# Altium PCB PCB1.PcbDoc
Units mil, origin at the board's own origin, x right, y up, seen from the top; angles counter-clockwise.
Board outline 1375.36 x 2570.03 mil, 2 copper layers (Top Layer, Bottom Layer); 50 components, 34 nets, 131 pads, 21 vias.
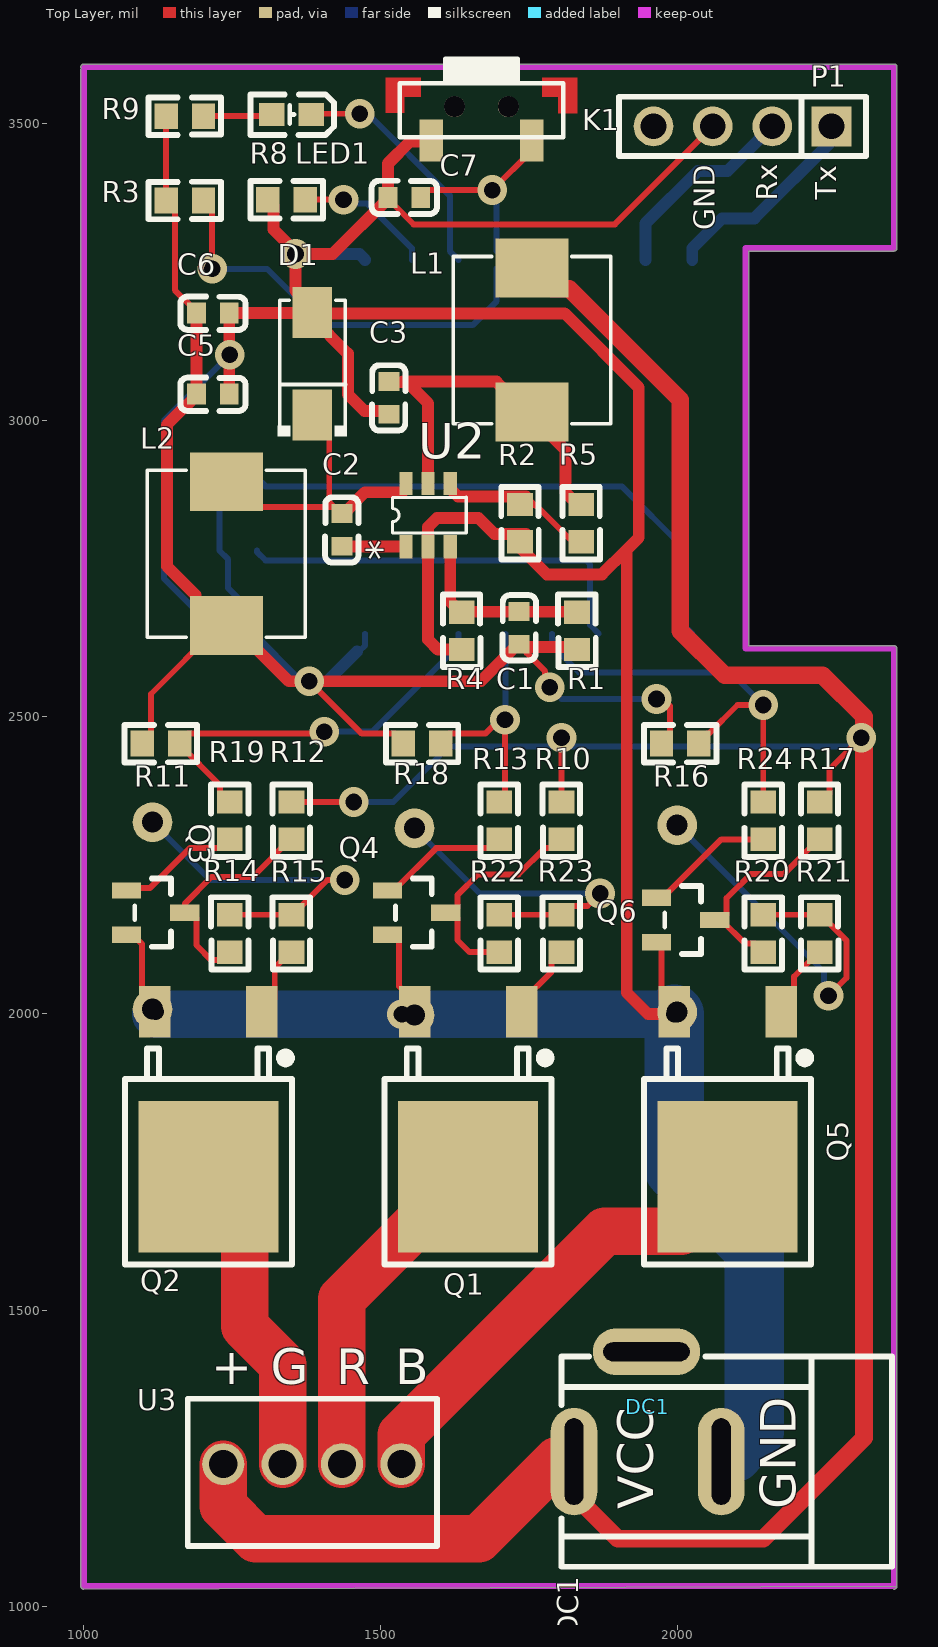
[diagram p0: Top Layer view]
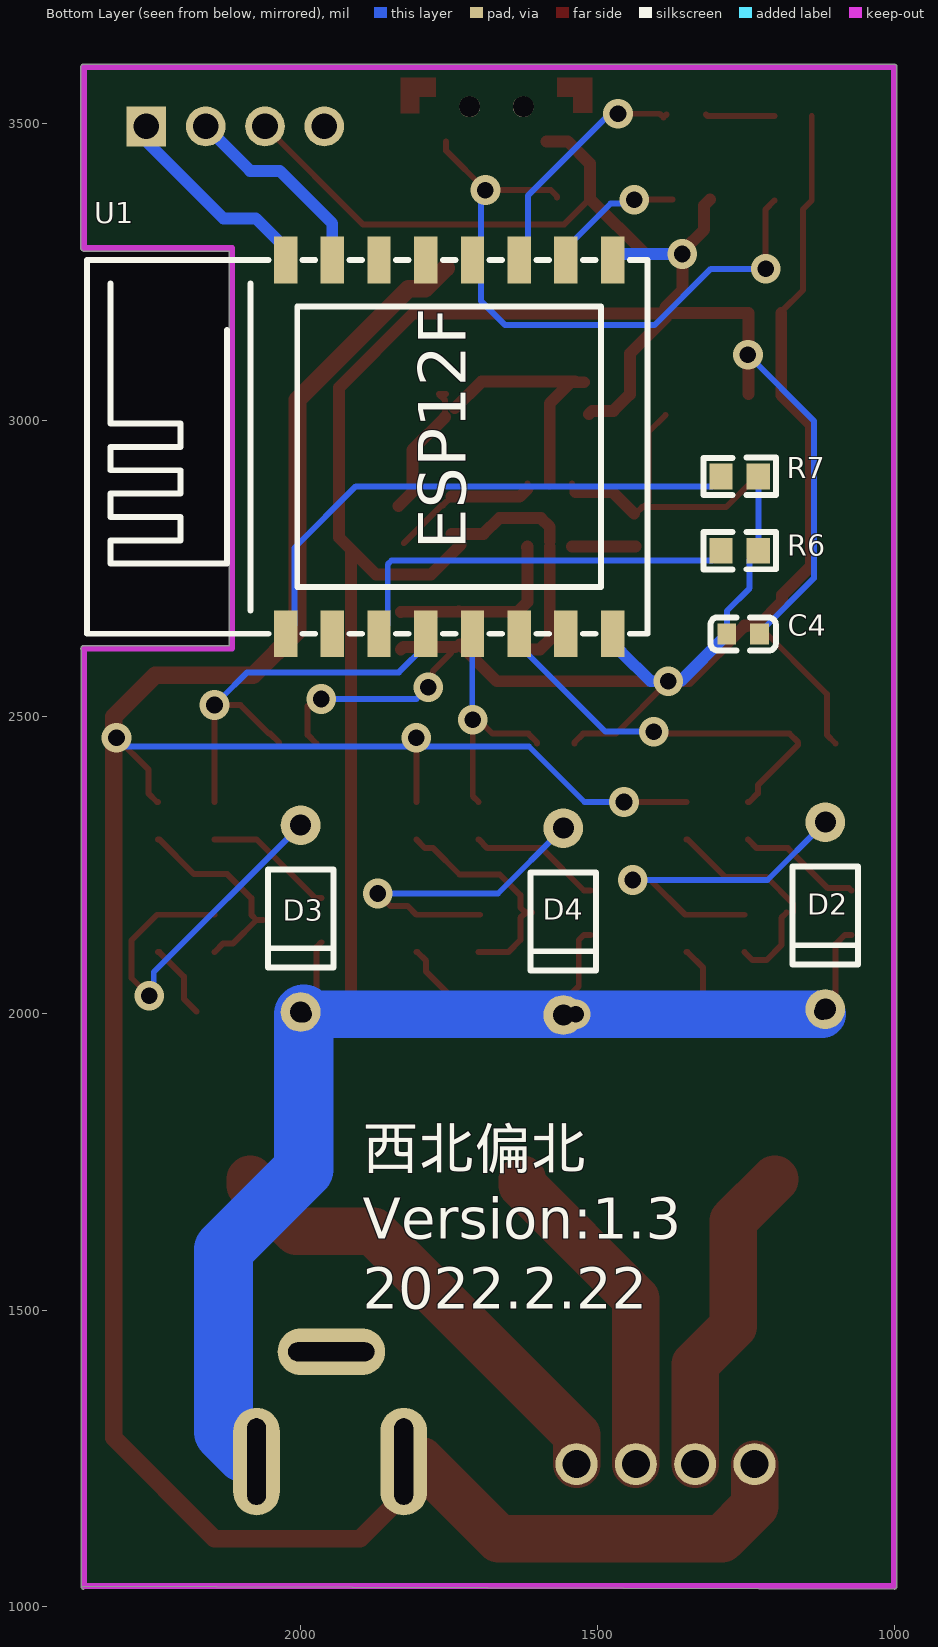
[diagram p1: Bottom Layer view, seen from below]

## Layer stack, top to bottom
Top Solder: solder mask 0.4, Solder Resist, Dk 3.5
Top Layer: signal copper 1.4
Dielectric 1: dielectric 12.6, FR-4, Dk 4.8
Bottom Layer: signal copper 1.4
Bottom Solder: solder mask 0.4, Solder Resist, Dk 3.5

## Board outline
1000,1029.98 cw(c1000,1035) 994.99,1035 994.98,3590 cw(c1000,3590) 995.65,3592.5 cw(c1000,3595) 1000,3600.01 2365.33,3600.01 cw(c2365.33,3595) 2370.35,3595 2370.35,3290 cw(c2365.33,3290) 2365.33,3284.99 2120.18,3284.99 2120.18,2620.01 2365.16,2620.01 cw(c2365.16,2615) 2370.18,2615 cw(c2365.16,2615) 2370.01,2613.72 2370.01,1035 cw(c2365,1035) 2368.55,1031.45 cw(c2365,1035) 2365,1029.98 ccw(c2365,1035) 2368.55,1031.45 2370.01,1035 cw(c2365,1035)

## Design rules (kind name [scope] priority, off if disabled: settings)
Clearance [All] p1: gap=10 ignorepadtopadclearanceinfootprint=FALSE except(0: Arc-Hole Track-Hole SMDPad-Hole THPad-Hole Via-Hole Fill-Hole Poly-Hole Region-Hole Text-Hole)
PolygonConnect [All] p1: connectstyle=Relief reliefconductorwidth=10 reliefentries=4 polygonreliefangle="90 Angle" airgapwidth=10
RoutingVias [All] p1: holewidth=28 width=50 viastyle="Through Hole" minholewidth=28 minwidth=50 maxholewidth=28 maxwidth=50
SolderMaskExpansion [All] p1: expansion=4
Width [All] p1: maxlimit=100 minlimit=10 preferedwidth=10
30 further rules are at their usual default settings.

## Components (designator, comment, footprint, x,y, rotation, side; value= is the part's Value field where it differs from the comment)
C1 "20pf" C0603 1733.47,2650 r270 top
C2 "0.1u" C0603 1435.16,2815 r90 top
C3 "10u" C0603 1514.22,3037.44 r90 top
C4 "0.1u" C0603 1254.18,2640 r0 bottom
C5 "47uf/16v" C0603 1217.61,3043.82 r180 top
C6 "0.1uf" C0603 1217.61,3180.43 r180 top
C7 "1u" C0603 1540.16,3375 r0 top
D1 "SS14_C2900678" SMA_L4.3-W2.5-LS5.0-RD-1 1385.16,3095 r90 top
D2 "1N4746A_C843681" DO-41_BD2.8-L4.2-P8.00-D0.7-FD 1115.8,2165 r270 bottom
D3 "1N4746A_C843681" DO-41_BD2.8-L4.2-P8.00-D0.7-FD 2000,2160 r270 bottom
D4 "1N4746A_C843681" DO-41_BD2.8-L4.2-P8.00-D0.7-FD 1557.34,2155 r270 bottom
DC1 "DC005-2.0MM" DC-IN-TH_DC005-T20 1950.21,1337.53 r180 top
K1 "TS-1188E" "SMD SWITCH 7X3.6X2.7" 1670,3516.35 r180 top
L1 "4.7uH" IND-SMD_L7.3-W6.6_MHCI06030 1755.16,3135 r270 top
L2 "4.7uH" IND-SMD_L7.3-W6.6_MHCI06030 1240.16,2775 r90 top
LED1 "RED" LED0603-R-RD 1350.16,3514.8 r180 top
P1 "" HDR-TH_4P-P2.54-V-M 2110,3495 r180 top
Q1 "IRFR1205TRPBF" TO-252-2_L6.5-W6.1-P4.58-LS10.0-TR 1647.5,1864.1 r0 top
Q2 "IRFR1205TRPBF" TO-252-2_L6.5-W6.1-P4.58-LS10.0-TR 1210,1864.1 r0 top
Q3 "S8050" SOT-23(SOT-23-3) 1121.02,2170 r270 top
Q4 "S8050" SOT-23(SOT-23-3) 1560.8,2170 r270 top
Q5 "IRFR1205TRPBF" TO-252-2_L6.5-W6.1-P4.58-LS10.0-TR 2085,1864.1 r0 top
Q6 "S8050" SOT-23(SOT-23-3) 2014.2,2157.6 r270 top
R1 "75k" R0603 1831.16,2645 r90 top
R2 "20k" R0603 1735.16,2826.31 r90 top
R3 "10k" R0603 1170.16,3370 r0 top
R4 "24k" R0603 1636.66,2645 r90 top
R5 "100k" R0603 1838.16,2826.31 r90 top
R6 "10k" R0603 1260.16,2780 r180 bottom
R7 "10k" R0603 1260.16,2905 r180 bottom
R8 "10k" R0603 1341.71,3371.54 r180 top
R9 "10k" R0603 1170.16,3512.3 r0 top
R10 "5.1k" R0603 1805,2324.97 r90 top
R11 "10k" R0603 1130,2455 r180 top
R12 "5.1k" R0603 1350,2324.97 r90 top
R13 "100k" R0603 1700,2325 r270 top
R14 "1k" R0603 1246.18,2135 r270 top
R15 "10" R0603 1350,2134.97 r90 top
R16 "10k" R0603 2005,2455 r180 top
R17 "5.1k" R0603 2240,2324.97 r90 top
R18 "10k" R0603 1570,2455 r180 top
R19 "10k" R0603 1246.18,2325 r270 top
R20 "1k" R0603 2145,2135 r270 top
R21 "10" R0603 2240,2134.97 r90 top
R22 "1k" R0603 1700,2135 r270 top
R23 "10" R0603 1805,2134.97 r90 top
R24 "10k" R0603 2145,2325 r270 top
U1 "ESP-12S" WIFIM-SMD_ESP-12F-ESP8266MOD 1720.16,2955 r180 bottom
U2 "MP2451DT-LF-P" SOT23-6_MPS 1580.16,2840 r90 top
U3 "JL308-25404G01" CONN-TH_4P-P2.54_JILN_JL308-25404G01 1385,1240.62 r0 top

## Footprints (in the part's own frame and the unit in brackets; to place one, negate y for a bottom-side part, rotate by r counter-clockwise, add the part's x,y. Pads: shape width x height; smd on the part's side, far side on the other; paste and mask are expansions set on the pad)
C0603 [mm]
  rect 0.8x0.9 smd: 1(-0.7,0) 2(0.7,0)
  silkscreen extent -1.4,-0.7 1.4,0.72
CONN-TH_4P-P2.54_JILN_JL308-25404G01 [mm]
  round 1.8 hole 1.2: 1(-3.81,0) 2(-1.27,0) 3(1.27,0) 4(3.81,0)
  silkscreen extent -5.33,-3.5 5.33,2.8
DC-IN-TH_DC005-T20 [mm]
  oval 2x4.6 hole 0.8 slot 3.7 at 90 deg: 1(3.15,2.35) 2(-3.15,2.35)
  oval 4.6x2 hole 0.8 slot 3.7 at 0 deg: 3(0.05,-2.35)
  silkscreen extent -10.45,-2.15 3.68,6.85
DO-41_BD2.8-L4.2-P8.00-D0.7-FD [mm]
  round 1.7 hole 0.9: 1(-4,0) 2(4,0)
  silkscreen extent -2.1,-1.4 2.1,1.4
HDR-TH_4P-P2.54-V-M [mm]
  rect 1.7x1.7 hole 1.1: 1(-3.81,0)
  round 1.7 hole 1.1: 2(-1.27,0) 3(1.27,0) 4(3.81,0)
  silkscreen extent -5.29,-1.27 5.29,1.27
IND-SMD_L7.3-W6.6_MHCI06030 [mm]
  rect 2.524x3.12 smd: 1(-3.078,0) 2(3.078,0)
  silkscreen extent -3.58,-3.38 3.58,3.38
LED0603-R-RD [mil]
  rect 43x39 smd: 1(33.5,0) 2(-33.5,0)
  silkscreen extent -72,-34 70,34
R0603 [mm]
  rect 1x1.1 smd: 1(-0.8,0) 2(0.8,0)
  silkscreen extent -1.55,-0.8 1.55,0.81
SMA_L4.3-W2.5-LS5.0-RD-1 [mm]
  rect 2.185x1.7 smd: 1(-2.2,0) 2(2.2,0)
  silkscreen extent -3.11,-1.48 2.73,1.48
"SMD SWITCH 7X3.6X2.7" [mm]
  rect 1x1.8 smd: 1(-2.149,1.15) 2(2.147,1.15)
  round 0.9 hole 0.9 unplated: ""(-1.151,-0.3) ""(1.151,-0.3)
  Top Layer region: -3.298,-0.031 -3.298,-0.732 -2.597,-0.732 -2.597,-1.532 -4.099,-1.532 -4.099,-0.031
  Top Layer region: 2.597,-0.735 3.298,-0.735 3.298,-0.034 4.098,-0.034 4.098,-1.535 2.597,-1.535
  silkscreen extent -3.5,-2.35 3.5,1
SOT23-6_MPS [mil]
  rect 39.5x22 smd paste+0 mask+0: 1(-53.25,37.4) 2(-53.25,0) 3(-53.25,-37.4) 4(53.25,-37.4) 5(53.25,0) 6(53.25,37.4)
  silkscreen extent -30,-64 30,60
SOT-23(SOT-23-3) [mm]
  rect 0.7x1.25 smd: 1(-0.95,-1.25) 2(0.95,-1.25) 3(0,1.25)
  silkscreen extent -1.46,-0.9 1.46,0.65
TO-252-2_L6.5-W6.1-P4.58-LS10.0-TR [mm]
  rect 1.35x2.2 smd: 1(2.29,3.533) 3(-2.29,3.533)
  rect 6x6.5 smd: 4(0,-3.533)
  silkscreen extent -3.57,-7.3 3.57,1.95
WIFIM-SMD_ESP-12F-ESP8266MOD [mm]
  rect 1x2 smd: 1(-7.751,-8.002) 2(-5.751,-8.002) 3(-3.751,-8.002) 4(-1.751,-8.002) 5(0.249,-8.002) 6(2.249,-8.002) 7(4.249,-8.002) 8(6.249,-8.001) 9(6.249,7.999) 10(4.249,8) 11(2.249,8.002) 12(0.249,8.001) 13(-1.751,8) 14(-3.751,8.001) 15(-5.751,8) 16(-7.751,8.001)
  silkscreen extent -16.25,-8 7.75,8

## Part data
C1 C3 C5 C6: library part 0.1u, Contributor=LCEDA_Lib, nameAlias=Value(F), spicePre=C, spiceSymbolName=C_0603_EU
D1: BOM_Manufacturer="BLUE ROCKET(蓝箭)", BOM_Manufacturer Part=SS14, BOM_Supplier=LCSC, BOM_Supplier Part=C2900678, Contributor=LCSC, spicePre=D, spiceSymbolName=SS14_C2900678
D2 D3 D4: BOM_Manufacturer=FUXINSEMI(富芯森美), BOM_Manufacturer Part=1N4746A, BOM_Supplier=LCSC, BOM_Supplier Part=C843681, Contributor=LCSC, spicePre=D, spiceSymbolName=1N4746A_C843681
DC1: BOM_JLCPCB Part Class="Extended Part", BOM_Manufacturer=SOFNG, BOM_Manufacturer Part=DC005-2.0MM, BOM_Supplier=LCSC, BOM_Supplier Part=C111567, spicePre=D, spiceSymbolName=DC005-2.0MM
K1: BOM_Manufacturer=ReliaPro, BOM_Manufacturer Part="3*6*3.5 Side press  High temperature", BOM_Supplier=LCSC, BOM_Supplier Part=C37327, catid=20, spicePre=K
L1 L2: BOM_JLCPCB Part Class="Extended Part", BOM_Manufacturer=SXN, BOM_Manufacturer Part=SMMS0630-4R7M, BOM_Supplier=LCSC, BOM_Supplier Part=C128688, nameAlias=Inductance, spicePre=L, spiceSymbolName=SMMS0630-4R7M
LED1: BOM_Manufacturer=EKINGLUX, BOM_Manufacturer Part=E6C0603URAC1UDA, BOM_Supplier=LCSC, BOM_Supplier Part=C375444, Contributor=LCSC, spicePre=L, spiceSymbolName=E6C0603URAC1UDA
P1: library part KH-2.54PH180-1X4P-L11.5, BOM_Manufacturer=kinghelm(金航标), BOM_Manufacturer Part=KH-2.54PH180-1X4P-L11.5, BOM_Supplier=LCSC, BOM_Supplier Part=C2905435, Contributor=LCSC, spicePre=H, spiceSymbolName=KH-2.54PH180-1X4P-L11.5
Q1 Q2 Q5: BOM_JLCPCB Part Class="Extended Part", BOM_Manufacturer=Infineon, BOM_Manufacturer Part=IRFR1205TRPBF, BOM_Supplier=LCSC, BOM_Supplier Part=C81467, spicePre=Q, spiceSymbolName=IRFR1205TRPBF
Q3 Q4 Q6: BOM_LCSC Assembly=Yes, BOM_Manufacturer=Yenji, BOM_Manufacturer Part=S8050, BOM_Supplier=LCSC, BOM_Supplier Part=C139514, Contributor=LCSC, SMT Type=Extend, spicePre=Q
R1 R2 R4 R5: library part 10k, BOM_Manufacturer="Vishay Intertech", BOM_Manufacturer Part=CRCW060310K0JNEA, BOM_Supplier=LCSC, BOM_Supplier Part=C169103, nameAlias=Value(Ω), spicePre=R, spiceSymbolName=Resistor
R3 R9: BOM_Manufacturer="Vishay Intertech", BOM_Manufacturer Part=CRCW060310K0JNEA, BOM_Supplier=LCSC, BOM_Supplier Part=C169103, nameAlias=Value(Ω), spicePre=R, spiceSymbolName=Resistor
R6 R7 R8 R10 R11 R12 R13 R14 R15 R16 R17 R18 R19 R20 R21 R22 R23 R24: library part NC, Contributor=LCEDA_Lib, nameAlias=Value(Ω), spicePre=R, spiceSymbolName=R_0603_EU
U1: BOM_JLCPCB SMD=Yes, BOM_Manufacturer=Ai-Thinker, BOM_Manufacturer Part=ESP-12S, BOM_Supplier=LCSC, BOM_Supplier Part=C82898, Contributor=HalfSweet, SMT Type=Extend, spicePre=U, spiceSymbolName=ESP-12S
U2: "No Description Available", Mfr_Name="Monolithic Power Systems", Copyright="Copyright (C) 2022 Ultra Librarian. All rights reserved.", Manufacturer_Part_Number=MP2451DT-LF-P, RefDes=RefDes, Type=DEV
U3: BOM_Manufacturer=JILN(锦凌), BOM_Manufacturer Part=JL308-25404G01, BOM_Supplier=LCSC, BOM_Supplier Part=C2922599, Contributor=LCSC, spicePre=U, spiceSymbolName=JL308-25404G01
C2 C4 C7: Contributor=LCEDA_Lib, nameAlias=Value(F), spicePre=C, spiceSymbolName=C_0603_EU

## Via types
v1: diameter 50, hole 28, Top Layer to Bottom Layer, tented both sides, 18 vias
v2: diameter 50, hole 28, Top Layer to Bottom Layer, 3 vias

## Nets (pads, with @x,y where several pads share a name; then routed paths per layer and width w, separated by ;. In a path a pad name is that pad's centre, name@x,y a point inside that pad or via, vN(x,y) a via of type N, cw(c..) or ccw(c..) an arc to the next point about the centre after c; other vN are vias at no path point)
+3V3: C1.2 C4.2 C5.2 C6.2 L2.1 R1.1 R3.1 R6.2 R7.2 R9.1 R11.2 R16.2 R18.2 U1.8 | length 3006.4
  Top Layer w10: R11.2 1113.19,2469.68 1113.19,2538.58 L2.1@1228.43,2653.82 ; R9.1 R3.1 1153.36,3355.32 1153.36,3219.1 1190.05,3182.4 C6.2 ; v1(1380.16,2560) 1468.51,2471.65 1523.82,2471.65 1538.51,2456.97 R18.2 ; C1.2@1731.5,2622.44 C1.2 1735.44,2622.44 1739.9,2617.97 1746.18,2611.69 1746.18,2607.76 1777.35,2576.59 1777.35,2557.65 v1(1785,2550) ; v1@1957.86,2535 1962.86,2530 v1(1965,2530) 1976.54,2530 1988.19,2518.35 1988.19,2469.68 R16.2
  Top Layer w20: C6.2 C5.2 1190.05,3041.85 1140.16,2991.96 1140.16,2753.82 1188.75,2705.24 1188.75,2693.5 1228.43,2653.82 L2.1 L2.1@1251.9,2653.82 ; L2.1@1249.97,2651.89 L2.1@1251.9,2653.82 ; C1.2@1731.5,2622.44 1669.06,2560 v1(1380.16,2560) 1345.72,2560 L2.1@1251.9,2653.82 ; C1.2@1739.9,2617.97 1826.7,2617.97 R1.1
  Bottom Layer w10: R7.2 R6.2 1243.36,2765.32 1243.36,2716.81 1281.73,2678.43 C4.2 C4.2@1281.73,2638.03 ; U1.8@1460.16,2610 1463.8,2610 1474.12,2620.32 U1.8 ; v1(1785,2550) 1805,2530 v1(1965,2530)
  Bottom Layer w20: C4.2@1281.73,2638.03 1359.77,2560 v1(1380.16,2560) 1410.16,2560 U1.8@1460.16,2610
+12: DC1.1 L1.1 R10.2 R12.2 R17.2 U3.1 | length 4913.1
  Top Layer w10: R12.2 v1(1455,2356.47) ; R10.2 v1(1805,2465) ; R17.2 2241.97,2356.47 2256.65,2371.15 2256.65,2411.49 v1(2310.16,2465) v1@2315,2465
  Top Layer w30: L1.1 1789.85,3221.5 1818.17,3221.5 2005.16,3034.5 2005.16,2644.84 2080,2570 2245,2570 2315,2500 2315,2465 2315,1285 2145,1115 1900,1115 DC1.1@1790,1225
  Top Layer w80: U3.1 1235,1170 1290,1115 1665.71,1115 DC1.1@1796.96,1246.26
  Bottom Layer w10: v1(1455,2356.47) 1521.47,2356.47 1615,2450 v1@2305.16,2450
ADDR: R8.1 U1.10 | length 233.3
  Top Layer w10: R8.1 v1(1437.72,3371.54)
  Bottom Layer w10: v1(1437.72,3371.54) 1444.46,3364.8 1477.72,3364.8 1552.86,3289.66 U1.10
B1: Q5.4 U3.4 | length 783.6
  Top Layer w80: U3.4 1535,1290 1877.95,1632.95 2006.89,1632.95 2085,1711.06 Q5.4@2085,1720.9
BOUT1: R16.1 R24.1 U1.4 | length 718.1
  Top Layer w10: R16.1 2036.49,2456.97 2051.18,2471.65 2053.15,2471.65 2101.49,2520 v1(2145,2520) R24.1
  Bottom Layer w10: U1.4 1789.09,2620.3 1834.38,2575 2090,2575 2135,2530 v1@2150,2530
EN: R6.1 U1.3 | length 695.3
  Bottom Layer w10: R6.1 1291.66,2778.03 1306.34,2763.35 1846.82,2763.35 1853.14,2757.03 1853.14,2654.66 U1.3
G1: Q2.4 U3.2 | length 535.7
  Top Layer w80: Q2.4@1201.18,1720.9 1270.98,1651.09 1270.98,1472.95 1335,1408.93 U3.2
GND: C3.1 C4.1 C5.1 C6.1 C7.1 D1.2 D2.2 D3.2 D4.2 DC1.2 K1.2 P1.3 Q1.3 Q2.3 Q3.2 Q4.2 Q5.3 Q6.2 R2.1 R4.1 R8.2 U1.9 U2.2 | length 6942.3
  Top Layer w10: Q3.2 1082.64,2132.6 1098.26,2116.98 1098.26,2024.78 Q2.3 ; D1.2@1376.8,3180.43 D1.2@1383.98,3173.25 ; D1.2@1385.16,3188.8 D1.2@1385.16,3190 ; Q4.2 1522.43,2132.6 1531.21,2123.82 1531.21,2046.06 1557.34,2019.93 Q1.3 ; C7.1@1512.61,3373.03 1555.64,3330 1895,3330 P1.3 P1.3@2078.73,3513.73 ; U2.2 U2.2@1580.16,2795.5 ; R2.1@1730.16,2792.88 R2.1@1745.48,2808.19 ; Q6.2 1973.26,2111.94 1973.26,2024.78 Q5.3
  Top Layer w20: C5.1 C6.1 D1.2@1376.8,3180.43 ; R8.2 1319.9,3361.85 1319.9,3320.98 1356.7,3284.19 v1(1356.7,3280) ; D1.2@1383.98,3173.25 1445.16,3112.07 1445.16,3043.27 1472.8,3015.64 1508.47,3015.64 C3.1 ; D1.2@1385.16,3180 1810.16,3180 1935.16,3055 1935.16,2802.08 1915,2781.91 ; D1.2@1385.16,3190 1356.7,3218.46 v1(1356.7,3280) ; U2.2 1580.16,2630 1596.66,2613.51 R4.1 ; U2.2@1580.16,2795.5 1580.16,2820 1595.16,2835 1665.16,2835 1691.97,2808.19 R2.1@1745.48,2808.19 ; K1.2@1585.64,3469.72 1549.88,3469.72 1512.61,3432.44 C7.1 1512.61,3373.03 1419.58,3280 v1(1356.7,3280) ; R2.1@1730.16,2792.88 1730.16,2790 1780.16,2740 1873.09,2740 1915,2781.91 ; v2(1994.84,1999.1) 1950.9,1999.1 1915,2035 1915,2781.91
  Bottom Layer w10: C4.1@1226.35,2637.76 C4.1@1226.62,2638.03 ; C4.1 1226.62,2641.97 1135,2733.59 1135,2998.82 v1(1246.18,3110)
  Bottom Layer w20: C4.1@1226.62,2638.03 C4.1 ; v1(1356.7,3280) 1464.44,3280 1474.12,3270.32 U1.9
  Bottom Layer w80: D2.2@1121.02,1999.1 v2(1536.28,1999.1) v2(1994.84,1999.1)
  Bottom Layer w100: v2(1994.84,1999.1) 1994.84,1737.46 2130,1602.3 2130,1295 DC1.2@2095,1260
  other v2: 1121.02,2003.2
GOUT1: R11.1 R19.1 U1.6 | length 694.2
  Top Layer w10: R19.1 1244.21,2356.49 1229.53,2371.18 1229.53,2385 1161.49,2453.03 R11.1 1161.49,2456.97 1176.18,2471.65 1401.65,2471.65 v1(1405,2475)
  Bottom Layer w10: v1(1405,2475) 1486.31,2475 1631.6,2620.3 U1.6
key: C7.2 K1.1 R3.2 U1.12 | length 1095.5
  Top Layer w10: R3.2 1216.35,3355.32 v1(1216.35,3255) ; C7.2 1567.72,3376.97 1578.47,3387.72 v1(1688.5,3387.72) 1754.76,3453.97 K1.1@1754.76,3469.72
  Bottom Layer w10: v1(1216.35,3255) 1308.67,3255 1403.67,3160 1655.16,3160 1695.66,3200.49 1695.66,3255.3 U1.12 1695.66,3284.68 1695.66,3380.56 v1(1688.5,3387.72)
LED: LED1.2 U1.11 | length 417.8
  Top Layer w10: LED1.2 1388.47,3510 1394.82,3516.35 v1(1465.16,3516.35)
  Bottom Layer w10: v1@1460.16,3510 1465.16,3515 v1(1465.16,3516.35) 1478.82,3516.35 1616.92,3378.25 1616.92,3284.7 U1.11
NetC1_1: C1.1 R1.2 R4.2 U2.3 | length 316.1
  Top Layer w20: U2.3@1618.57,2785.75 U2.3 1617.57,2693.62 1634.69,2676.49 R4.2 1637.19,2677.03 1732.94,2677.03 C1.1 1734,2677.03 1830.63,2677.03 R1.2
NetC2_1: C2.1 U2.1 | length 107.9
  Top Layer w20: C2.1 1435.86,2786.75 U2.1
NetC2_2: C2.2 D1.1 L2.2 U2.6 | length 521.5
  Top Layer w10: L2.2 1283.04,2853.31 C2.2@1422.45,2853.31 ; D1.1 1413.63,2979.92 1413.63,2862.12 C2.2@1422.45,2853.31 ; C2.2@1437.72,2842.56 C2.2 1424.42,2853.31 C2.2@1422.45,2853.31 ; U2.6@1536.76,2878.5 1542.76,2884.5 U2.6
  Top Layer w20: C2.2@1437.72,2842.56 1473.66,2878.5 U2.6@1536.76,2878.5
NetC3_2: C3.2 L1.2 R5.2 U2.5 | length 666.1
  Top Layer w10: L1.2@1755.16,3043.82 1766.9,3043.82 1756.35,3033.27 L1.2@1756.35,3005
  Top Layer w20: C3.2@1522.46,3063.75 1544.68,3063.75 1580.16,3028.27 U2.5 ; 1537.72,3065 1695.16,3065 L1.2@1740.16,3020 ; L1.2@1756.35,3005 1811.58,2949.76 1811.58,2878.58 R5.2@1835.16,2855
NetD2_1: D2.1 R14.1 R15.2 | length 576.9
  Top Layer w10: R14.1@1251.92,2166.47 R15.2 1351.97,2166.47 1410.5,2225 v1(1440,2225)
  Bottom Layer w10: D2.1 1213.28,2225 v1(1440,2225)
NetD3_1: D3.1 R20.1 R21.2 | length 656.8
  Top Layer w10: R20.1 R21.2 ; R21.2 2241.97,2166.47 2285,2123.44 2285,2060 v1(2255,2030)
  Bottom Layer w10: D3.1 2247.48,2070 2247.48,2037.52 v1(2255,2030)
NetD4_1: D4.1 R22.1 R23.2 | length 550.4
  Top Layer w10: D4.1@1557.34,2307.19 D4.1 ; R22.1@1698.03,2166.49 R22.1 R23.2 ; R23.2 1819.68,2181.15 1848.75,2181.15 v1(1870,2202.4)
  Bottom Layer w10: D4.1 1667.42,2202.4 v1(1870,2202.4)
NetLED1_1: LED1.1 R9.2 | length 116
  Top Layer w10: R9.2 1314.16,3512.3 LED1.1
NetQ1_1: Q1.1 R23.1 | length 129.3
  Top Layer w10: Q1.1 1737.66,2019.93 1788.35,2070.61 1788.35,2088.8 1803.03,2103.48 R23.1
NetQ2_1: Q2.1 R15.1 | length 122.1
  Top Layer w10: Q2.1 1321.74,2024.78 1321.74,2077.19 1348.03,2103.48 R15.1
NetQ3_1: Q3.1 R19.2 | length 210
  Top Layer w10: Q3.1 1075.84,2211.42 1111.42,2211.42 1178.82,2278.82 1231.49,2278.82 R19.2
NetQ3_3: Q3.3 R12.1 R14.2 | length 376.4
  Top Layer w10: Q3.3 1170.21,2185.22 1215,2230 1284.55,2230 1348.03,2293.48 R12.1 ; Q3.3@1181.04,2170 1189.82,2161.22 1189.82,2115.18 1215,2090 1238.39,2090 R14.2@1251.9,2103.51
NetQ4_1: Q4.1 R13.2 | length 224.1
  Top Layer w10: Q4.1 1522.43,2207.4 1593.85,2278.82 1685.32,2278.82 R13.2
NetQ4_3: Q4.3 R10.1 R22.2 | length 387
  Top Layer w10: Q4.3 Q4.3@1620.83,2170 ; R22.2 1650,2103.48 1629.61,2123.87 1629.61,2161.22 Q4.3@1620.83,2170 ; R10.1 1790.32,2278.8 1776.73,2278.8 1732.33,2234.4 1664.4,2234.4 1629.61,2199.61 1629.61,2178.78 Q4.3@1620.83,2170
NetQ5_1: Q5.1 R21.1 | length 128.3
  Top Layer w10: Q5.1 2196.74,2024.78 2196.74,2062.19 2238.03,2103.48 R21.1
NetQ6_1: Q6.1 R24.2 | length 220.8
  Top Layer w10: Q6.1 1975.83,2195 2074.33,2293.51 R24.2
NetQ6_3: Q6.3 R17.1 R20.2 | length 342.5
  Top Layer w10: Q6.3 Q6.3@2074.23,2157.6 ; R20.2 2130.32,2118.19 2113.64,2118.19 Q6.3@2074.23,2157.6 ; R17.1 2238.03,2293.48 2179.55,2235 2123.64,2235 2083.01,2194.37 2083.01,2166.38 Q6.3@2074.23,2157.6
NetR2_2: R2.2 R5.1 U2.4 | length 255.4
  Top Layer w10: U2.4@1617.57,2884.5 U2.4 ; R2.2@1745.48,2871.18 1760.16,2856.49 1762.13,2856.49 R5.1@1826.15,2792.48
  Top Layer w20: U2.4@1617.57,2884.5 1630.89,2871.18 R2.2@1745.48,2871.18
R1: Q1.4 U3.3 | length 559.6
  Top Layer w80: U3.3 1435,1519.62 1626.44,1711.06 Q1.4@1626.44,1720.9
ROUT1: R13.1 R18.1 U1.5 | length 438.5
  Top Layer w10: R18.1 1601.49,2456.97 1616.18,2471.65 1676.64,2471.65 1699.98,2495 v1(1709.86,2495) 1709.86,2366.35 R13.1
  Bottom Layer w10: U1.5@1710.34,2620.3 U1.5 1710.7,2639.62 v1@1710.7,2490
RST: R7.1 U1.1 | length 920.7
  Bottom Layer w10: R7.1 1291.66,2903.03 1306.34,2888.35 1906.82,2888.35 2010.62,2784.55 2010.62,2654.66 U1.1
RX: P1.2 U1.15 | length 342.6
  Bottom Layer w20: U1.15 1946.57,3331.4 2035.16,3420 2085,3420 P1.2
TX: P1.1 U1.16 | length 354.1
  Bottom Layer w20: U1.16 2025.31,3289.68 2075.63,3340 2130,3340 2260,3470 P1.1
pads on no net: DC1.3 K1. P1.4 U1.2 U1.7 U1.13 U1.14

## Keep-outs
Keep-Out Layer:
  lines w10: 1000,3590 1000,1035 2365,1035 ; 1000,3595 2365.33,3595 2365.33,3290 2115.16,3290 2115.16,2615 2365.16,2615 ; 2365,2615 2365,1035 ; 2365,1035 2365,1035

## Silkscreen, mask and mechanical layers (free items; w line width, h text height)
Top Overlay:
  text "Tx" at 2280,3371.54 h60 r90
  text "Rx" at 2180,3370 h60 r90
  text "GND" at 2075,3320 h60 r90
  text "+" at 1215,1375 h60
  text "G" at 1315,1375 h60
  text "R" at 1425,1375 h60
  text "B" at 1525,1375 h60
  text "VCC" at 1960,1165 h60 r90
  text "GND" at 2200,1165 h60 r90
Bottom Overlay:
  text "西北偏北 / Version:1.3 / 2022.2.22" at 1895,1480 h118.11

## Text inside footprints (layer, text, board x,y; h text height)
U1: Bottom Overlay "ESP12F" at 1721.49,2781.68 h80 r270
U2: Top Overlay "*" at 1525.76,2764.25 h50 r90